# EAGLE board 555srvc-legend (EAGLE 7.2.0)
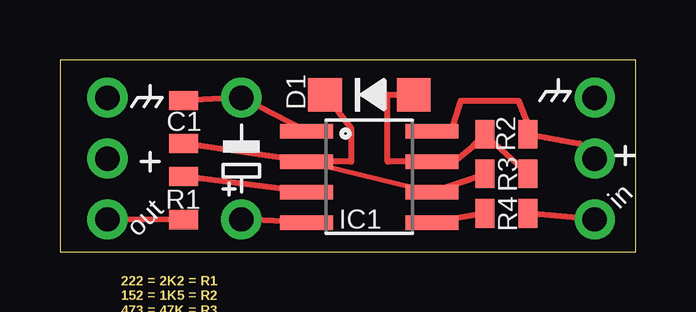
[diagram p0: board, top side]
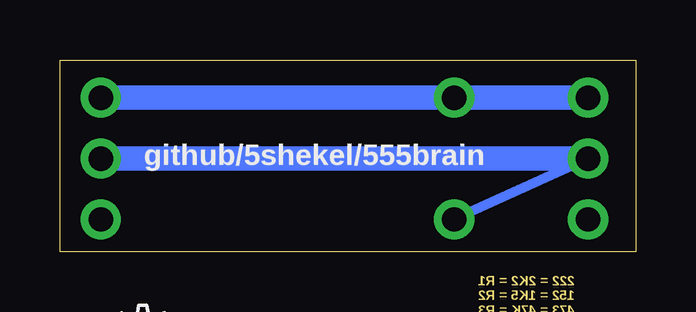
[diagram p1: board, bottom side, seen from below]

Size 24 x 8 mm. Coordinates in mm from the lower left corner, seen from the top.
Outline: 0,0 24,0 24,8 0,8 0,0
Copper layers (1*16): Top 0.035mm / dielectric 1.5mm / Bottom 0.035mm
Design rules "smartporot-EagleRules": minimum track width 7mil, minimum drill 12mil, track to track 7mil, track to pad 7mil, pad to pad 7mil, via to via 7mil, smd to smd 0mil, copper to edge 20mil, drill to drill 10mil, minimum pad ring 10mil, minimum via ring 6mil, stop-mask expansion 2mil, vias tented up to drill 25mil, thermal gap 10mil

## Footprints (pad centres in the part's own frame; a part is rotated, then mirrored left to right if it is on the bottom)
0805 = smd 0.8 x 1.2: 1 -0.9,0; 2 0.9,0
E5-6 = drill 1.016 pad 1.677: + -2.54,0 | drill 1.016 pad 1.676: - 2.54,0
SOD-123 = smd 1.4 x 1.4: A 1.85,0; C -1.85,0
SO08 = smd 0.61 x 2.21: 1 -1.905,-2.616; 2 -0.635,-2.616; 3 0.635,-2.616; 4 1.905,-2.616; 5 1.905,2.616; 6 0.635,2.616; 7 -0.635,2.616; 8 -1.905,2.616
1X03-CLEANBIG = drill 1.016 pad 1.676: 1 -2.54,0; 2 0,0; 3 2.54,0

## Placement (x,y rotation side)
C1  1uF  [0805]  5.15,5.41 90 top
C2  [E5-6]  7.57,3.88 90 top
D1  [SOD-123]  12.9,6.55 0 top
IC1  555  [SO08]  12.9,3.12 270 top
JP2  SERVO_OUT  [1X03-CLEANBIG]  1.98,3.88 270 top
JP3  INPUT / CV  [1X03-CLEANBIG]  22.3,3.88 270 top
R1  2.2k  [0805]  5.15,2.23 270 top
R2  1.5k  [0805]  18.61,4.9 180 top
R3  47k  [0805]  18.61,3.25 0 top
R4  15k  [0805]  18.61,1.6 0 top
U$5  [OSHW_6X100_NOTEXT]  21.95,-4.78 0 bottom  (outside the outline)

## Library data of the parts
C1 C2 D1 IC1 JP2 JP3 R1-R4 = 555srvc
U$5 = ohw-logo

## Nets
GND: C1.2 C2.- IC1.1 JP2.1 JP3.1
INPUT: JP3.3 R4.2
N$1: C1.1 D1.C IC1.2 IC1.6 R3.1
N$2: D1.A IC1.7 R2.2 R3.2
N$4: IC1.5 R4.1
N$5: IC1.3 R1.1
SERVO_OUT: JP2.3 R1.2
VCC: C2.+ IC1.4 IC1.8 JP2.2 JP3.2 R2.1

## Tracks (layer width: path | path; a pad name or v marks a point on that pad's centre or on a via)
GND
  Top 0.254: C1.2 C2.- IC1.1
  Bottom 1.016: JP3.1 C2.- JP2.1
INPUT
  Top 0.254: JP3.3 R4.2
N$1
  Top 0.203: IC1.2 IC1.6
  Top 0.254: D1.C 12.14,5.15 12.14,3.76 IC1.2 C1.1 | IC1.6 R3.1
N$2
  Top 0.254: D1.A 13.66,6.55 13.66,3.76 IC1.7 16.46,3.76 17.22,4.39 17.22,4.4 R2.2 17.86,4.52 18.12,4.52 R3.2
N$4
  Top 0.254: R4.1 IC1.5
N$5
  Top 0.254: IC1.3 R1.1
SERVO_OUT
  Top 0.254: R1.2 JP2.3
VCC
  Top 0.254: IC1.4 C2.+ | IC1.8 16.33,5.03 16.71,6.3 19.12,6.3 19.5,5.28 19.5,4.53 R2.1 21.66,4.52 JP3.2
  Bottom 0.406: JP2.2 C2.+
  Bottom 1.016: JP3.2 JP2.2

## Text on the board
Dimension: 222 = 2K2 = R1 / 152 = 1K5 = R2 / 473 = 47K = R3 / 153 = 15K = R4 / / ??? = 1uF = C1 / S4 = diode = D1
tPlace: in | out
bNames: github/5shekel/555brain